# EAGLE board Broadcast Buttons Shield (EAGLE 6.2)
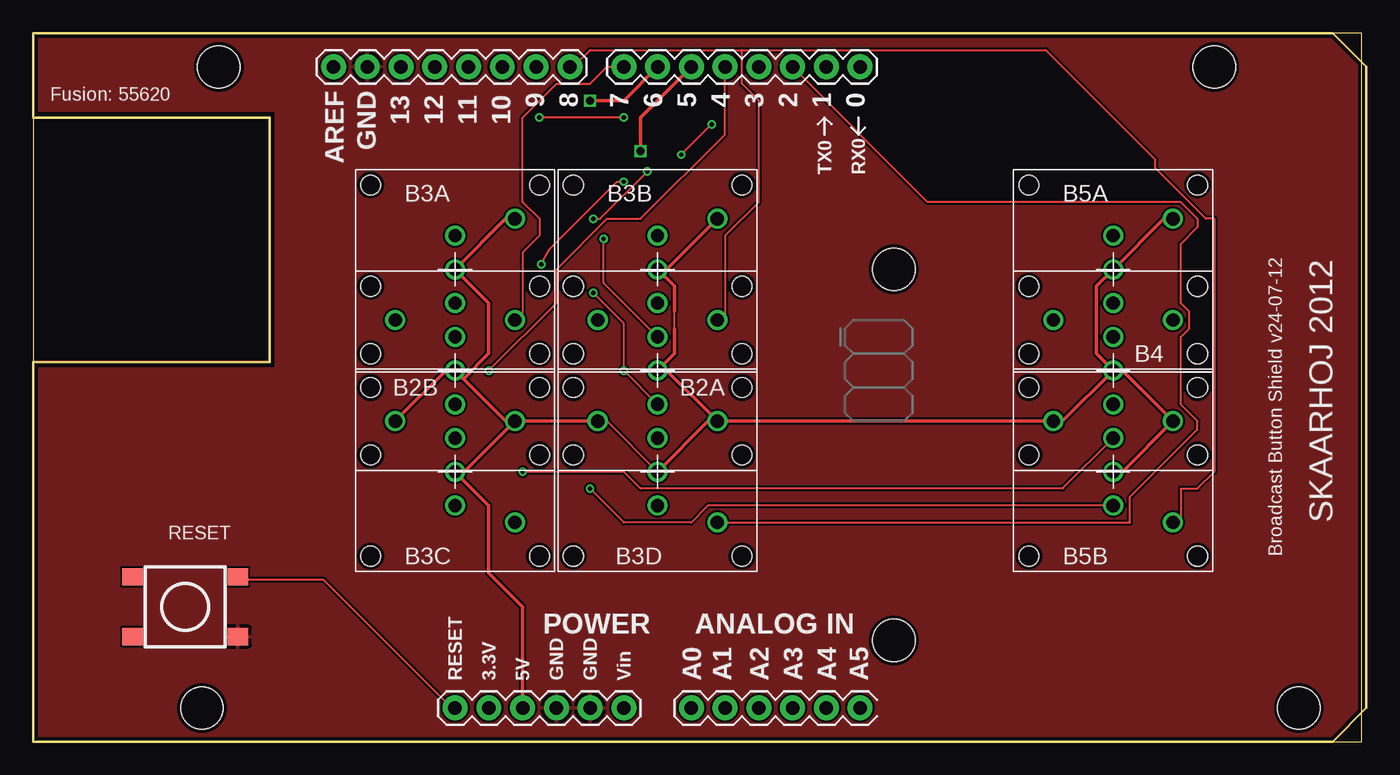
[diagram p0: board, top side]
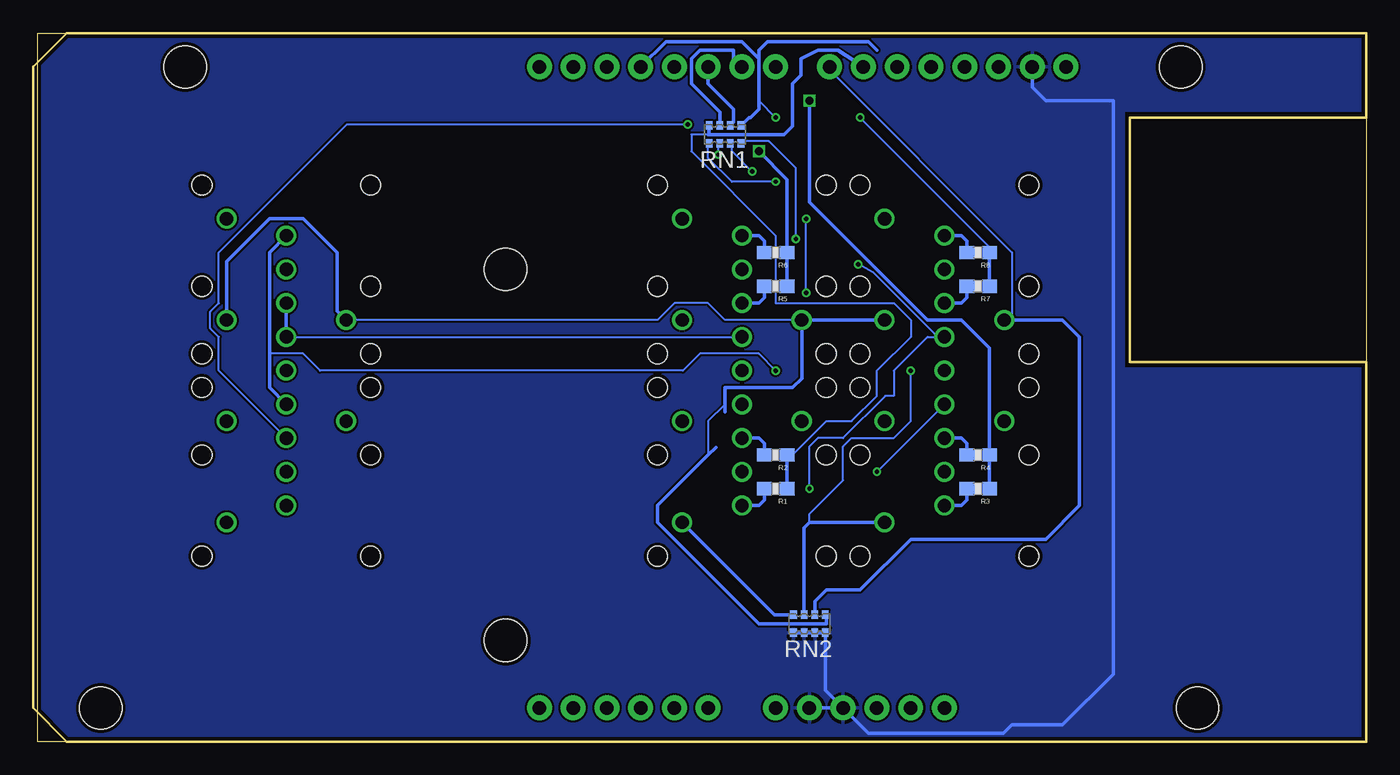
[diagram p1: board, bottom side, seen from below]

Size 100 x 53.33 mm. Coordinates in mm from the lower left corner, seen from the top.
Outline: 0,0 100,0 100,53.33 0,53.33 0,0
Copper layers (1*16): Top 0.035mm / dielectric 1.5mm / Bottom 0.035mm
Design rules: minimum track width 6mil, minimum drill 12mil, track to track 6mil, track to pad 6mil, pad to pad 6mil, via to via 6mil, smd to smd 0mil, copper to edge 10mil, drill to drill 10mil, minimum pad ring 10mil, minimum via ring 6mil, stop-mask expansion 2mil, vias tented up to drill 100mil, thermal gap 10mil

## Footprints (pad centres in the part's own frame; a part is rotated, then mirrored left to right if it is on the bottom)
LP11 = drill 1: COM 0,0; P$2 0,2.54; P$3 0,-2.54; P$4 4.5,3.81; P$5 4.5,-3.81 | hole 1.5: -6.35,6.35; 6.35,6.35; 6.35,-6.35; -6.35,-6.35
0603-RES = smd 1.1 x 1: 1 -0.85,0; 2 0.85,0
CAY16 = smd 0.5 x 0.65: 1 -1.2,-0.675; 2 -0.4,-0.675; 3 0.4,-0.675; 4 1.2,-0.675; 5 1.2,0.675; 6 0.4,0.675; 7 -0.4,0.675; 8 -1.2,0.675
TACTILE_SWITCH_TALL = smd 1.55 x 1.3: A1 -3.975,-2.25; A2 3.975,-2.25; B1 -3.975,2.25; B2 3.975,2.25
ARDUINO_BOXSHIELD = drill 1.016 pad 1.88: 0 62.23,50.8; 1 59.69,50.8; 2 57.15,50.8; 3 54.61,50.8; 3.3V 34.29,2.54; 4 52.07,50.8; 5 49.53,50.8; 5V@0 36.83,2.54; 6 46.99,50.8; 7 44.45,50.8; 8 40.386,50.8; 9 37.846,50.8; 10 35.306,50.8; 11 32.766,50.8; 12 30.226,50.8; 13 27.686,50.8; A0 49.53,2.54; A1 52.07,2.54; A2 54.61,2.54; A3 57.15,2.54; A4 59.69,2.54; A5 62.23,2.54; AREF 22.606,50.8; GND@0 39.37,2.54; GND@1 41.91,2.54; GND@4 25.146,50.8; RESET 31.75,2.54; VIN 44.45,2.54 | hole 3.2: 13.97,50.8; 12.7,2.54; 64.77,35.56; 64.77,7.62; 88.9,50.8; 95.25,2.54

## Placement (x,y rotation side)
B2A  LP11-B"  [LP11]  46.99,27.94 180 top
B2B  LP11-B"  [LP11]  31.75,27.94 180 top
B3A  LP11-B"  [LP11]  31.75,35.56 0 top
B3B  LP11-B"  [LP11]  46.99,35.56 0 top
B3C  LP11-B"  [LP11]  31.75,20.32 0 top
B3D  LP11-B"  [LP11]  46.99,20.32 0 top
B4  LP11-B"  [LP11]  81.28,27.94 180 top
B5A  LP11-B"  [LP11]  81.28,35.56 0 top
B5B  LP11-B"  [LP11]  81.28,20.32 0 top
R1  [0603-RES]  44.45,19.05 180 bottom
R2  [0603-RES]  44.45,21.59 180 bottom
R3  [0603-RES]  29.21,19.05 180 bottom
R4  [0603-RES]  29.21,21.59 180 bottom
R5  [0603-RES]  44.45,34.29 180 bottom
R6  [0603-RES]  44.45,36.83 180 bottom
R7  [0603-RES]  29.21,34.29 180 bottom
R8  [0603-RES]  29.21,36.83 180 bottom
RN1  220  [CAY16]  48.26,45.72 0 bottom
RN2  10K  [CAY16]  41.91,8.89 0 bottom
S1  SWITCH-MOMENTARY-2  [TACTILE_SWITCH_TALL]  11.43,10.16 0 top
U1  ARDUINO_SHIELDBOXSHIELD  [ARDUINO_BOXSHIELD]  0,0 0 top

## Library data of the parts
B2A B2B B3A B3B B3C B3D B4 B5A B5B U1 = SKAARHOJ
R1-R8 S1 = SparkFun
RN1 RN2 = resistor-dil; OC_FARNELL: unknown; OC_NEWARK: unknown

## Nets
5V: B2A.COM B2A.P$4 B2B.COM B2B.P$4 B3A.COM B3A.P$4 B3B.COM B3B.P$4 B3C.COM B3C.P$4 B3D.COM B3D.P$4 B4.COM B4.P$4 B5A.COM B5A.P$4 B5B.COM B5B.P$4 U1.5V@0
GND: RN2.1 RN2.2 RN2.3 RN2.4 S1.A2 U1.GND@0 U1.GND@1 U1.GND@4
N$2: B3D.P$3 R1.2
N$3: B2A.P$3 B4.P$3 B5A.P$3 RN1.4
N$4: B3D.P$2 R2.2
N$5: B3C.P$3 R3.2
N$6: B3C.P$2 R4.2
N$7: B3C.P$5 RN2.7 U1.4
N$8: R5.1 R6.1 RN1.6 U1.5
N$9: R3.1 R4.1 RN1.7 U1.6
N$10: R1.1 R2.1 RN1.8 U1.9
N$11: B2B.P$5 B3B.P$5 B5B.P$5 RN2.6 U1.8
N$12: B2A.P$2 B4.P$2 B5A.P$2 RN1.3
N$13: B2B.P$2 B5B.P$2 RN1.2
N$14: B2B.P$3 B5B.P$3 RN1.1
N$15: B2A.P$5 B3A.P$5 B4.P$5 B5A.P$5 RN2.5 U1.7
N$16: B3B.P$3 R5.2
N$17: B3B.P$2 R6.2
N$18: B3A.P$3 R7.2
N$19: B3A.P$2 R8.2
N$20: B3D.P$5 RN2.8 U1.2
N$21: R7.1 R8.1 RN1.5 U1.3
N$23: S1.B2 U1.RESET

## Tracks (layer width: path | path; a pad name or v marks a point on that pad's centre or on a via)
5V
  Top 0.152: 48.26,30.48 48.26,33.02 | B3D.COM 43.18,24.13 B2A.P$4
  Top 0.254: U1.5V@0 36.83,10.16 34.29,12.7 34.29,17.78 B3C.COM 32.44,20.32 B3C.P$4 | B3C.P$4 B2A.P$4 | B3D.P$4 47.68,27.94 B2A.COM 48.26,29.21 48.26,30.48 48.26,31.06 | B3D.P$4 50.8,24.13 B3D.COM | B3C.P$4 35.56,24.13 32.38,27.3 | 32.38,27.3 B2B.COM 31.06,27.94 B2B.P$4 | 48.26,32.44 48.26,33.02 48.26,34.29 B3B.COM 47.68,35.56 B3B.P$4 | B3A.P$4 35.56,39.37 B3A.COM 34.29,33.02 34.29,29.21 32.38,27.3 | B3D.P$4 B4.P$4 77.47,24.13 B4.COM | B4.COM 81.97,27.94 B5B.P$4 81.97,20.32 B5B.COM | B5A.P$4 85.09,39.37 B5A.COM 80.01,34.29 80.01,29.21 B4.COM
GND
  Bottom 0.254: RN2.1 RN2.2 RN2.3 RN2.4 40.71,3.88 U1.GND@0 | U1.GND@0 U1.GND@1 | U1.GND@0 37.47,0.64 27.3,0.64 26.67,1.27 22.86,1.27 19.05,5.08 19.05,48.26 24.13,48.26 25.15,49.28 U1.GND@4
  pour Bottom: 0,0 0,53.34 100.33,53.34 100.33,44.45 100.33,0
  pour Top: 0,53.34 100.33,53.34 100.33,0 0,0
N$2
  Bottom 0.254: R1.2 45.3,18.2 45.72,17.78 B3D.P$3
N$3  (via drill 0.33)
  Top 0.152: v42.93,37.85 42.93,34.54 B2A.P$3
  Bottom 0.152: B4.P$3 B2A.P$3 | v42.93,37.85 42.93,43.18 44.96,45.21 46.99,45.21 RN1.4
  Bottom 0.254: B5A.P$3 B4.P$3
N$4
  Bottom 0.254: R2.2 45.3,22.44 45.72,22.86 B3D.P$2
N$5
  Bottom 0.254: R3.2 30.06,18.2 30.48,17.78 B3C.P$3
N$6
  Bottom 0.254: R4.2 30.06,22.44 30.48,22.86 B3C.P$2
N$7  (via drill 0.33)
  Top 0.152: U1.4 52.07,45.72 45.72,39.37 43.18,39.37 39.37,35.56 39.37,33.02 v34.29,27.94
  Bottom 0.152: v34.29,27.94 34.29,24.13 35.56,22.86 38.73,22.86 39.37,22.23 39.37,19.68 41.91,17.14 41.91,16.51
  Bottom 0.254: RN2.7 42.31,16.11 41.91,16.51 B3C.P$5
N$8  (via drill 0.6)
  Top 0.254: v45.72,44.45 45.72,46.99 U1.5
  Bottom 0.254: R5.1 R6.1 43.6,42.33 v45.72,44.45 | U1.5 49.53,49.53 47.62,47.62 47.62,46.63 RN1.6
N$9  (via drill 0.6)
  Top 0.254: v41.91,48.26 44.45,48.26 U1.6
  Bottom 0.254: R3.1 R4.1 28.36,29.63 30.48,31.75 33.02,31.75 41.91,40.64 v41.91,48.26 | RN1.7 48.66,47.39 50.8,49.53 50.8,51.44 50.16,52.07 47.62,52.07 47.62,51.44 U1.6
N$10
  Bottom 0.152: 49.53,45.72 50.8,45.72 50.8,44.45 44.45,38.1 44.45,33.02 35.56,33.02 34.29,31.75 34.29,30.48 36.83,27.94 36.83,26.04 38.73,24.13 40.64,24.13 43.18,21.59 R2.1
  Bottom 0.254: R2.1 R1.1 | U1.9 39.75,52.07 41.27,52.07 42.55,51.44 42.55,50.16 43.18,49.53 43.18,46.35 43.81,45.72 49.53,45.72 49.46,45.79 RN1.8
N$11
  Top 0.152: B3B.P$5 52.07,31.75 52.07,38.1 54.61,40.64 54.61,48.26 53.34,49.53 53.34,52.07 | U1.8 40.64,50.8 41.91,52.07 53.34,52.07 | 53.34,52.07 76.2,52.07 84.45,43.81 84.45,43.18 88.27,39.37 88.9,39.37 88.9,20.32 87.63,19.05 86.36,19.05 86.36,16.51 B5B.P$5
  Bottom 0.152: 26.67,31.75 26.67,36.83 40.64,50.8 U1.8
  Bottom 0.254: RN2.6 41.51,10.56 40.64,11.43 38.1,11.43 34.29,15.24 24.13,15.24 21.59,17.78 21.59,30.48 22.86,31.75 26.67,31.75 B2B.P$5
N$12  (via drill 0.33)
  Top 0.152: B2A.P$2 v44.45,27.94 44.45,31.5 v42.16,33.78 | v46.23,42.93 42.67,39.37 v42.16,39.37
  Bottom 0.152: v44.45,27.94 45.72,29.21 50.16,29.21 51.44,27.94 78.74,27.94 80.01,29.21 82.55,29.21 | v46.23,42.93 47.75,44.45 47.75,44.96 RN1.3 | v42.16,33.78 v42.16,39.37
  Bottom 0.254: B5A.P$2 82.55,36.83 82.55,29.21 82.55,26.67 B4.P$2
N$13  (via drill 0.33)
  Top 0.152: v36.83,20.32 44.45,20.32 45.72,19.05 77.47,19.05 B5B.P$2 | v51.05,46.48 v48.77,44.2
  Bottom 0.152: v36.83,20.32 B2B.P$2 | v48.77,44.2 48.77,44.96 RN1.2 | v51.05,46.48 76.71,46.48 86.36,36.83 86.36,33.02 87,32.38 87,31.11 86.36,30.48 86.36,27.94 B5B.P$2
N$14  (via drill 0.33)
  Top 0.152: v41.91,19.05 44.45,16.51 49.53,16.51 50.8,17.78 B5B.P$3 | v44.45,42.16 43.94,42.16 38.86,37.08 v38.23,35.94
  Bottom 0.152: 32.26,30.48 33.02,30.48 35.56,27.94 35.56,26.04 36.2,26.04 39.37,22.86 41.27,22.86 41.91,22.23 v41.91,19.05 | v44.45,42.16 47.75,42.16 49.53,43.94 49.53,44.96 RN1.1 | v38.23,35.94 37.08,35.31 32.26,30.48 | 32.26,30.48 B2B.P$3
N$15
  Top 0.152: U1.7 43.18,50.8 41.91,49.53 39.37,49.53 36.83,46.99 36.83,40.64 38.1,39.37 38.1,38.1 36.83,36.83 36.83,32.33 B3A.P$5 36.83,31.75
  Bottom 0.152: B4.P$5 53.34,31.75 52.07,33.02 49.53,33.02 48.26,31.75 B2A.P$5 | 49.53,21.59 49.53,24.13 48.26,25.4
  Bottom 0.254: B5A.P$5 85.78,36.14 82.55,39.37 80.01,39.37 77.47,36.83 77.47,32.44 B4.P$5 | B3A.P$5 B2A.P$5 42.49,27.36 43.18,26.67 48.26,26.67 48.26,25.4 48.26,24.82 | 48.95,22.17 49.53,21.59 53.34,17.78 53.34,16.51 45.72,8.89 40.64,8.89 40.64,9.49 RN2.5
N$16
  Bottom 0.254: R5.2 45.3,33.44 45.72,33.02 B3B.P$3
N$17
  Bottom 0.254: R6.2 45.3,37.68 45.72,38.1 B3B.P$2
N$18
  Bottom 0.254: R7.2 30.06,33.44 30.48,33.02 B3A.P$3
N$19
  Bottom 0.254: R8.2 30.06,37.68 30.48,38.1 B3A.P$2
N$20
  Top 0.152: U1.2 67.31,40.64 86.36,40.64 87.63,39.37 87.63,38.73 86.36,37.47 86.36,33.02 87,32.38 87,31.11 86.36,30.48 86.36,25.4 87.63,24.13 87.63,23.5 82.55,18.41 82.55,16.51 B3D.P$5
  Bottom 0.254: RN2.8 44.55,9.56 B3D.P$5
N$21  (via drill 0.33)
  Top 0.152: v44.45,46.99 v38.1,46.99
  Bottom 0.152: v38.1,46.99 27.94,36.83 R8.1 | 45.72,48.26 v44.45,46.99
  Bottom 0.254: R7.1 R8.1 | U1.3 52.7,52.7 46.99,52.7 45.72,51.44 | 45.72,51.44 45.72,48.26 45.72,47.62 46.35,46.99 46.47,46.99 RN1.5 | 45.72,51.44 45.72,52.07 45.09,52.7 37.47,52.7 36.83,52.07
N$23
  Top 0.152: U1.RESET 31.5,2.54 21.84,12.19 15.49,12.19 S1.B2

## Text on the board
_tsilk: Fusion: 55620 | SKAARHOJ 2012 | RESET | Broadcast Button Shield v24-07-12